# EAGLE board AirborneAce (EAGLE 9.6.2)
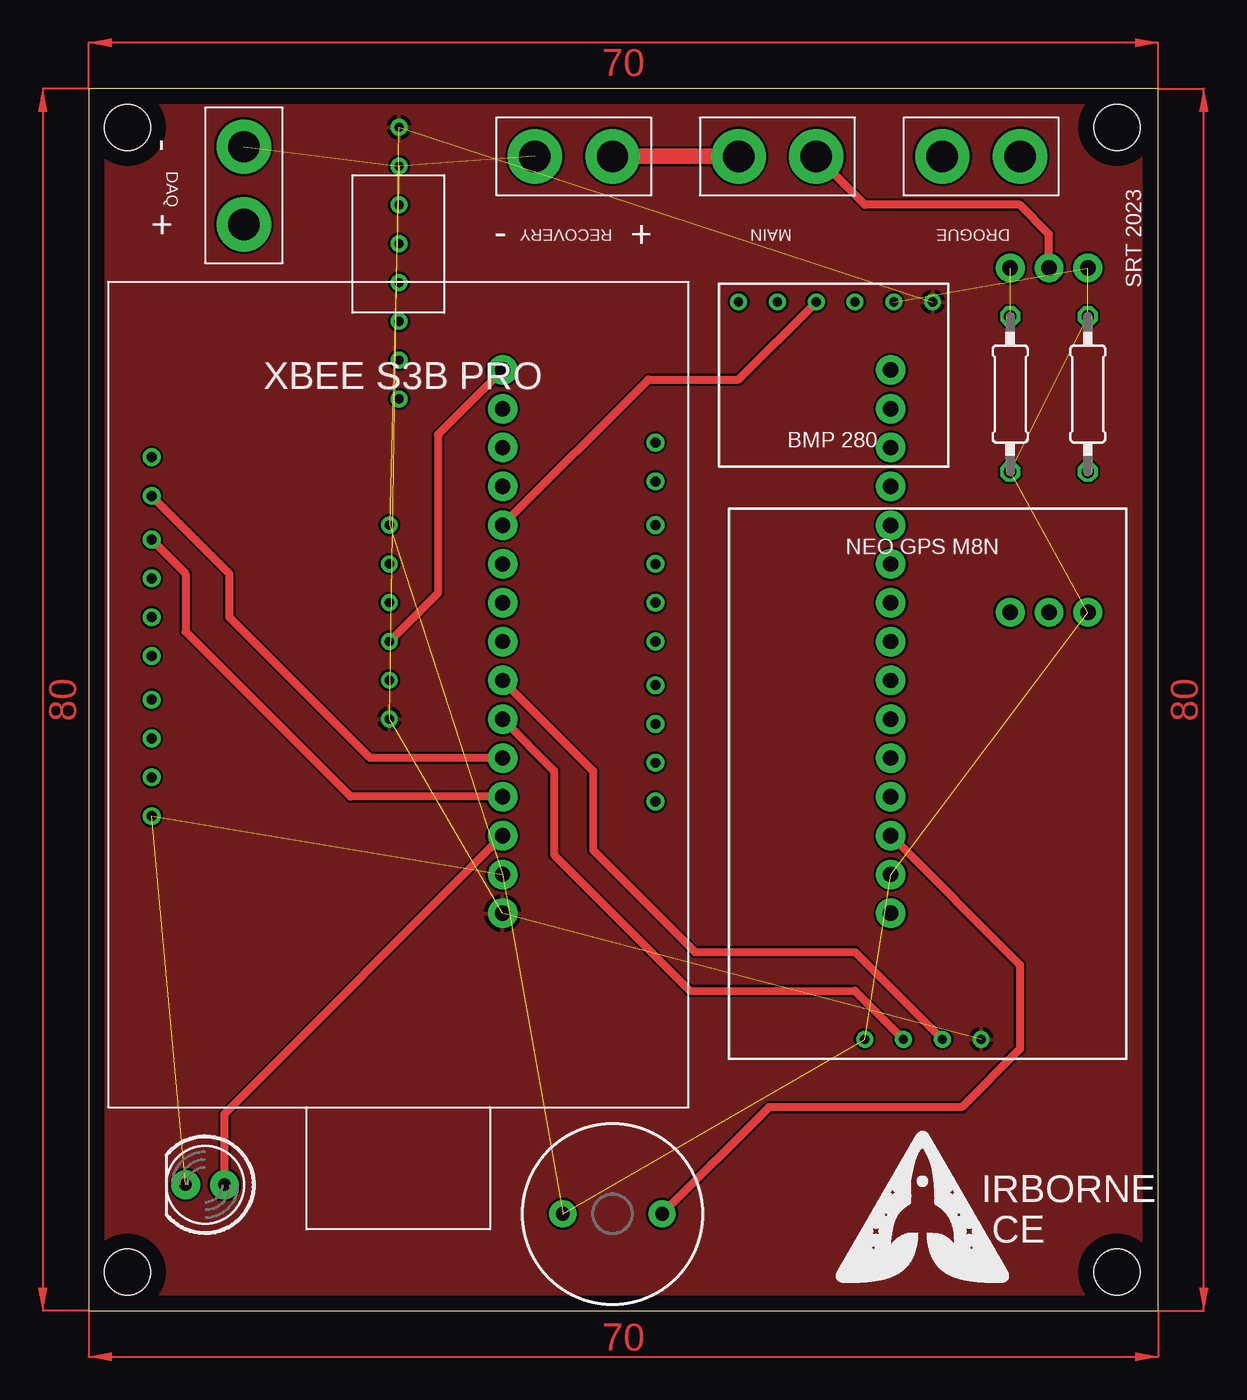
[diagram p0: board, top side]
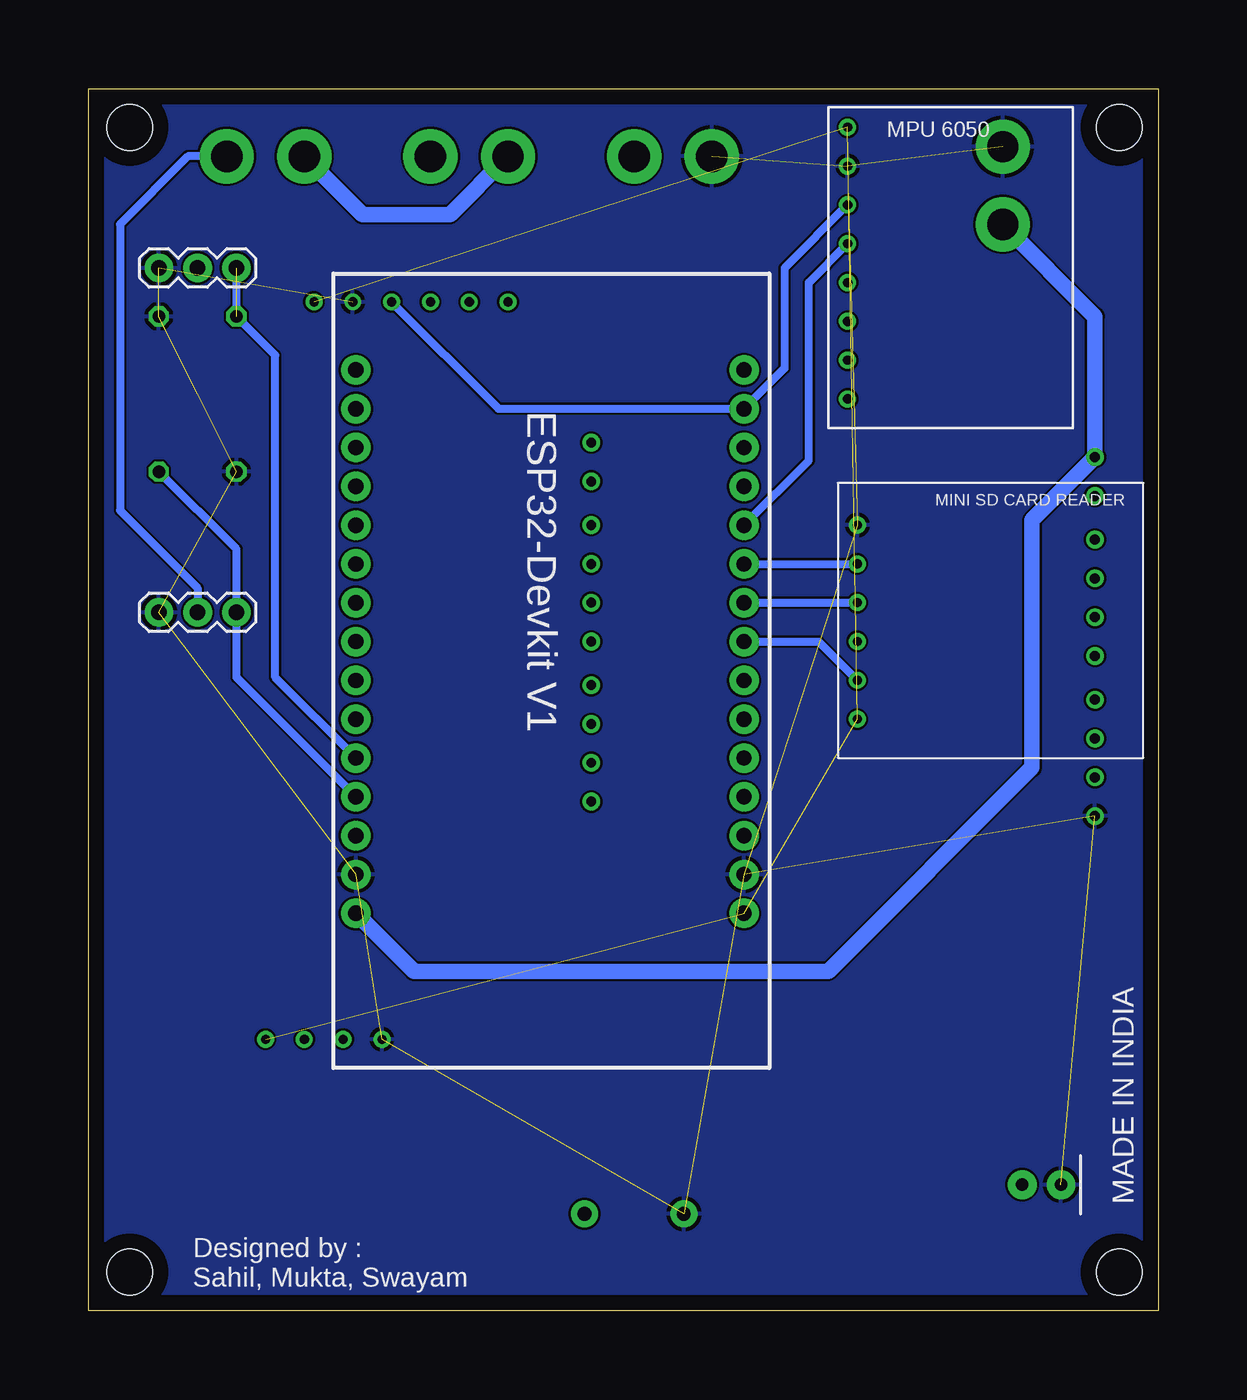
[diagram p1: board, bottom side, seen from below]

Size 70 x 80 mm. Coordinates in mm from the lower left corner, seen from the top.
Outline: 0,0 70,0 70,80 0,80 0,0
Copper layers (1*16): Top 0.035mm / dielectric 1.5mm / Bottom 0.035mm
Design rules "default": minimum track width 6mil, minimum drill 0.35mm, track to track 6mil, track to pad 6mil, pad to pad 6mil, via to via 6mil, smd to smd 6mil, copper to edge 40mil, drill to drill 6mil, minimum pad ring 10mil, minimum via ring 8mil, stop-mask expansion 4mil, vias tented up to drill 0mil, thermal gap 10mil
Holes 3 mm at 2.54,2.54 2.54,77.47 67.31,77.47 67.31,2.54

## Footprints (pad centres in the part's own frame; a part is rotated, then mirrored left to right if it is on the bottom)
LED_5MM = drill 0.813 pad 1.88: A -1.27,0; K 1.27,0
1X02_XTRA_BIG = drill 2.057 pad 3.556: 1 -2.54,0; 2 2.54,0
1X03 = drill 1.016 pad 1.88: 1 0,0; 2 2.54,0; 3 5.08,0
BUZZER-12MM = drill 0.9 pad 1.778: + 3.25,0; - -3.25,0
0207/10 = drill 0.813 octagon: 1 -5.08,0; 2 5.08,0
6050 = drill 0.6: ADO -6.35,-6.985; GND -6.35,5.715; INT -6.35,-9.525; SCL -6.35,3.175; SDA -6.35,0.635; VCC -6.35,8.255; XCL -6.35,-4.445; XDA -6.35,-1.905
ESP32-DEVKITV1 = drill 1 pad 1.93: 3V3 -16.52,-12.27; D1 13.96,-12.27; D2 -8.9,-12.27; D3 11.42,-12.27; D4 -6.36,-12.27; D5 1.26,-12.27; D12 -8.9,13.135; D13 -11.44,13.135; D14 -6.36,13.135; D15 -11.44,-12.27; D16 -3.82,-12.27; D17 -1.28,-12.27; D18 3.8,-12.27; D19 6.34,-12.27; D21 8.88,-12.27; D22 16.5,-12.27; D23 19.04,-12.27; D25 1.26,13.135; D26 -1.28,13.135; D27 -3.82,13.135; D32 6.34,13.135; D33 3.8,13.135; D34 11.42,13.135; D35 8.88,13.135; D36 16.5,13.135; D39 13.96,13.135; EN 19.04,13.135; GND@1 -13.98,13.135; GND@2 -13.98,-12.27; VIN -16.52,13.135
NEOGPSM8N = drill 0.6: GND -3.81,-16.51; RX 1.27,-16.51; TX -1.27,-16.51; VCC 3.81,-16.51
BMP280 = drill 0.6: CSB -3.81,5.08; GND 3.81,5.08; SCL 1.27,5.08; SDA -1.27,5.08; SDO -6.35,5.08; VCC 6.35,5.08
MNISD = drill 0.6: 3V3 -8.89,-6.35; CS -8.89,-3.81; GND -8.89,6.35; MISO -8.89,3.81; MOSI -8.89,-1.27; SCK -8.89,1.27
XBEES3BPRO = drill 0.65: 3V3 -16.192,18.415; GND -16.192,-5.08; P$5 -16.192,10.477; P$6 -16.192,7.938; P$7 -16.192,5.397; P$8 -16.192,2.54; P$9 -16.192,0; P$10 -16.192,-2.54; P$12 16.78,19.367; P$13 16.78,16.828; P$14 16.78,13.97; P$15 16.78,11.43; P$16 16.78,8.89; P$17 16.78,6.35; P$18 16.78,3.493; P$19 16.78,0.953; P$20 16.78,-1.587; P$21 16.78,-4.128; RX -16.192,13.018; TX -16.192,15.875

## Placement (x,y rotation side)
D1  [LED_5MM]  7.62,8.26 180 top
J1  [1X02_XTRA_BIG]  31.75,75.56 180 top
J2  [1X02_XTRA_BIG]  10.16,73.66 90 top
J3  [1X02_XTRA_BIG]  58.42,75.56 0 top
J6  455-1750-1-ND  [1X03]  65.41,45.72 0 bottom
J7  455-1750-1-ND  [1X03]  65.41,68.26 0 bottom
J8  [1X02_XTRA_BIG]  45.09,75.56 0 top
LS1  BUZZER-PTH  [BUZZER-12MM]  34.29,6.35 0 top
R3  [0207/10]  65.41,60.01 270 top
R4  [0207/10]  60.33,60.01 90 top
U$1  NEWMPU6050NEWMPU6050  [6050]  13.97,69.22 0 bottom
U$2  ESP32DEVKITV1  [ESP32-DEVKITV1]  39.37,42.55 90 bottom
U$3  NEOGPSM8NNEOGPSM8N  [NEOGPSM8N]  54.61,34.29 0 top
U$4  BMP280BMP280  [BMP280]  48.9,60.96 0 top
U$5  MINISD  [MNISD]  10.79,45.09 0 bottom
U$6  XBEES3BXBEES3B  [XBEES3BPRO]  20.32,37.47 0 top

## Library data of the parts
D1 = SparkFun-LED
J1-J3 J8 = SparkFun-Connectors
J6 J7 = SparkFun-Connectors; PROD_ID: XXX-00000
LS1 = SparkFun-Electromechanical; PROD_ID: COMP-08253; SF_SKU: COM-07950
R3 R4 = rcl; SPICEPREFIX: R
U$1 = MPU6050
U$2 = ESP32-DEVKITV1
U$3 = NEOGPSM8N
U$4 = BMP280
U$5 = minisd
U$6 = xbee s3b

## Nets
3V: U$1.VCC U$2.3V3 U$3.VCC U$4.VCC U$5.3V3
BUZZER: LS1.+ U$2.D13
CLK: U$2.D18 U$5.SCK
CS: U$2.D5 U$5.CS
DROGUE: J6.3 R3.2 U$2.D12
GND: D1.K J1.2 J2.2 J6.1 J7.1 LS1.- R3.1 R4.1 U$1.GND U$2.GND@1 U$2.GND@2 U$3.GND U$4.GND U$5.GND U$6.GND
GPS_RX: U$2.D17 U$3.RX
GPS_TX: U$2.D16 U$3.TX
LED: D1.A U$2.D15
MAIN: J7.3 R4.2 U$2.D14
MISO: U$2.D19 U$5.MISO
MOSI: U$2.D23 U$5.MOSI
NICHROME: J1.1 J3.1 J8.1
SCL: U$1.SCL U$2.D22 U$4.SCL
SDA: U$1.SDA U$2.D21 U$4.SDA
TERMINAL1: J3.2 J6.2
TERMINAL2: J7.2 J8.2
VIN: J2.1 U$2.VIN U$6.3V3
XBEE_RX: U$2.D2 U$6.RX
XBEE_TX: U$2.D4 U$6.TX

## Tracks (layer width: path | path; a pad name or v marks a point on that pad's centre or on a via)
3V  (4 unrouted)
  pour Top: 0,0 70,0 70,79.98 0,79.98
BUZZER
  Top 0.508: LS1.+ 44.52,13.34 57.15,13.34 60.96,17.14 60.96,22.65 U$2.D13
CLK
  Bottom 0.508: U$2.D18 27.09,46.35 U$5.SCK
CS
  Bottom 0.508: U$2.D5 22.21,43.8 U$5.CS
DROGUE
  Bottom 0.508: U$2.D12 60.33,41.47 J6.3 60.33,49.85 R3.2
GND  (14 unrouted)
  pour Bottom: 0,0 70,0 70,79.98 0,79.98
GPS_RX
  Top 0.508: U$3.RX 50.16,23.5 39.69,23.5 33.02,30.16 33.02,35.34 U$2.D17
GPS_TX
  Top 0.508: U$3.TX 50.16,20.95 39.37,20.95 30.48,29.84 30.48,35.34 U$2.D16
LED
  Top 0.508: D1.A 8.89,12.89 U$2.D15
MAIN  (1 unrouted)
  Bottom 0.508: J7.3 R4.2 57.78,62.55 57.78,41.47 U$2.D14
MISO
  Bottom 0.508: U$2.D19 U$5.MISO
MOSI
  Top 0.508: U$2.D23 22.86,57.34 22.86,46.99 U$5.MOSI
NICHROME
  Top 1.016: J1.1 J8.1
  Bottom 1.016: J8.1 46.35,71.75 52.07,71.75 J3.1
SCL
  Bottom 0.508: U$1.SCL 24.45,68.26 24.45,61.7 U$2.D22 27.4,59.05 27.41,59.05 43.18,59.05 U$4.SCL
SDA
  Top 0.508: U$2.D21 36.63,60.96 42.55,60.96 U$4.SDA
  Bottom 0.508: U$2.D21 22.86,55.66 22.86,67.31 U$1.SDA
TERMINAL1
  Bottom 0.508: J3.2 63.5,75.56 67.94,71.12 67.94,52.39 62.87,47.31 J6.2
TERMINAL2
  Top 0.508: J7.2 62.87,70.48 60.96,72.39 50.8,72.39 J8.2
VIN
  Bottom 1.016: J2.1 4.13,65.09 U$6.3V3 8.26,51.75 8.26,35.56 21.59,22.23 48.7,22.23 U$2.VIN
XBEE_RX
  Top 0.508: U$6.RX 6.35,48.26 6.35,44.45 17.14,33.66 26.79,33.66 26.8,33.65 U$2.D2
XBEE_TX
  Top 0.508: U$2.D4 18.41,36.2 9.21,45.4 9.21,48.26 U$6.TX
(copper drawn outside any net)
  shapes: Top area x4

## Text on the board
tNames: - | DAQ | RECOVERY | MAIN | DROGUE | + | - | + | SRT 2023 | IRBORNE / CE | C:/Users/91930/Downloads/pcb-watermark.bmp
bNames: MADE IN INDIA | Designed by : / Sahil, Mukta, Swayam